# Altium PCB NBP11 Xilinx Spartan-III BGA456 Rev1.01.PcbDoc (part 3 of 3)
Units mm, origin at the board's own origin, x right, y up, seen from the top; angles counter-clockwise.
Board outline 69 x 80.99 mm, 6 copper layers (Top Layer, MidLayer1, InternalPlane1, InternalPlane2, MidLayer2, Bottom Layer); 105 components, 277 nets, 967 pads, 559 vias.
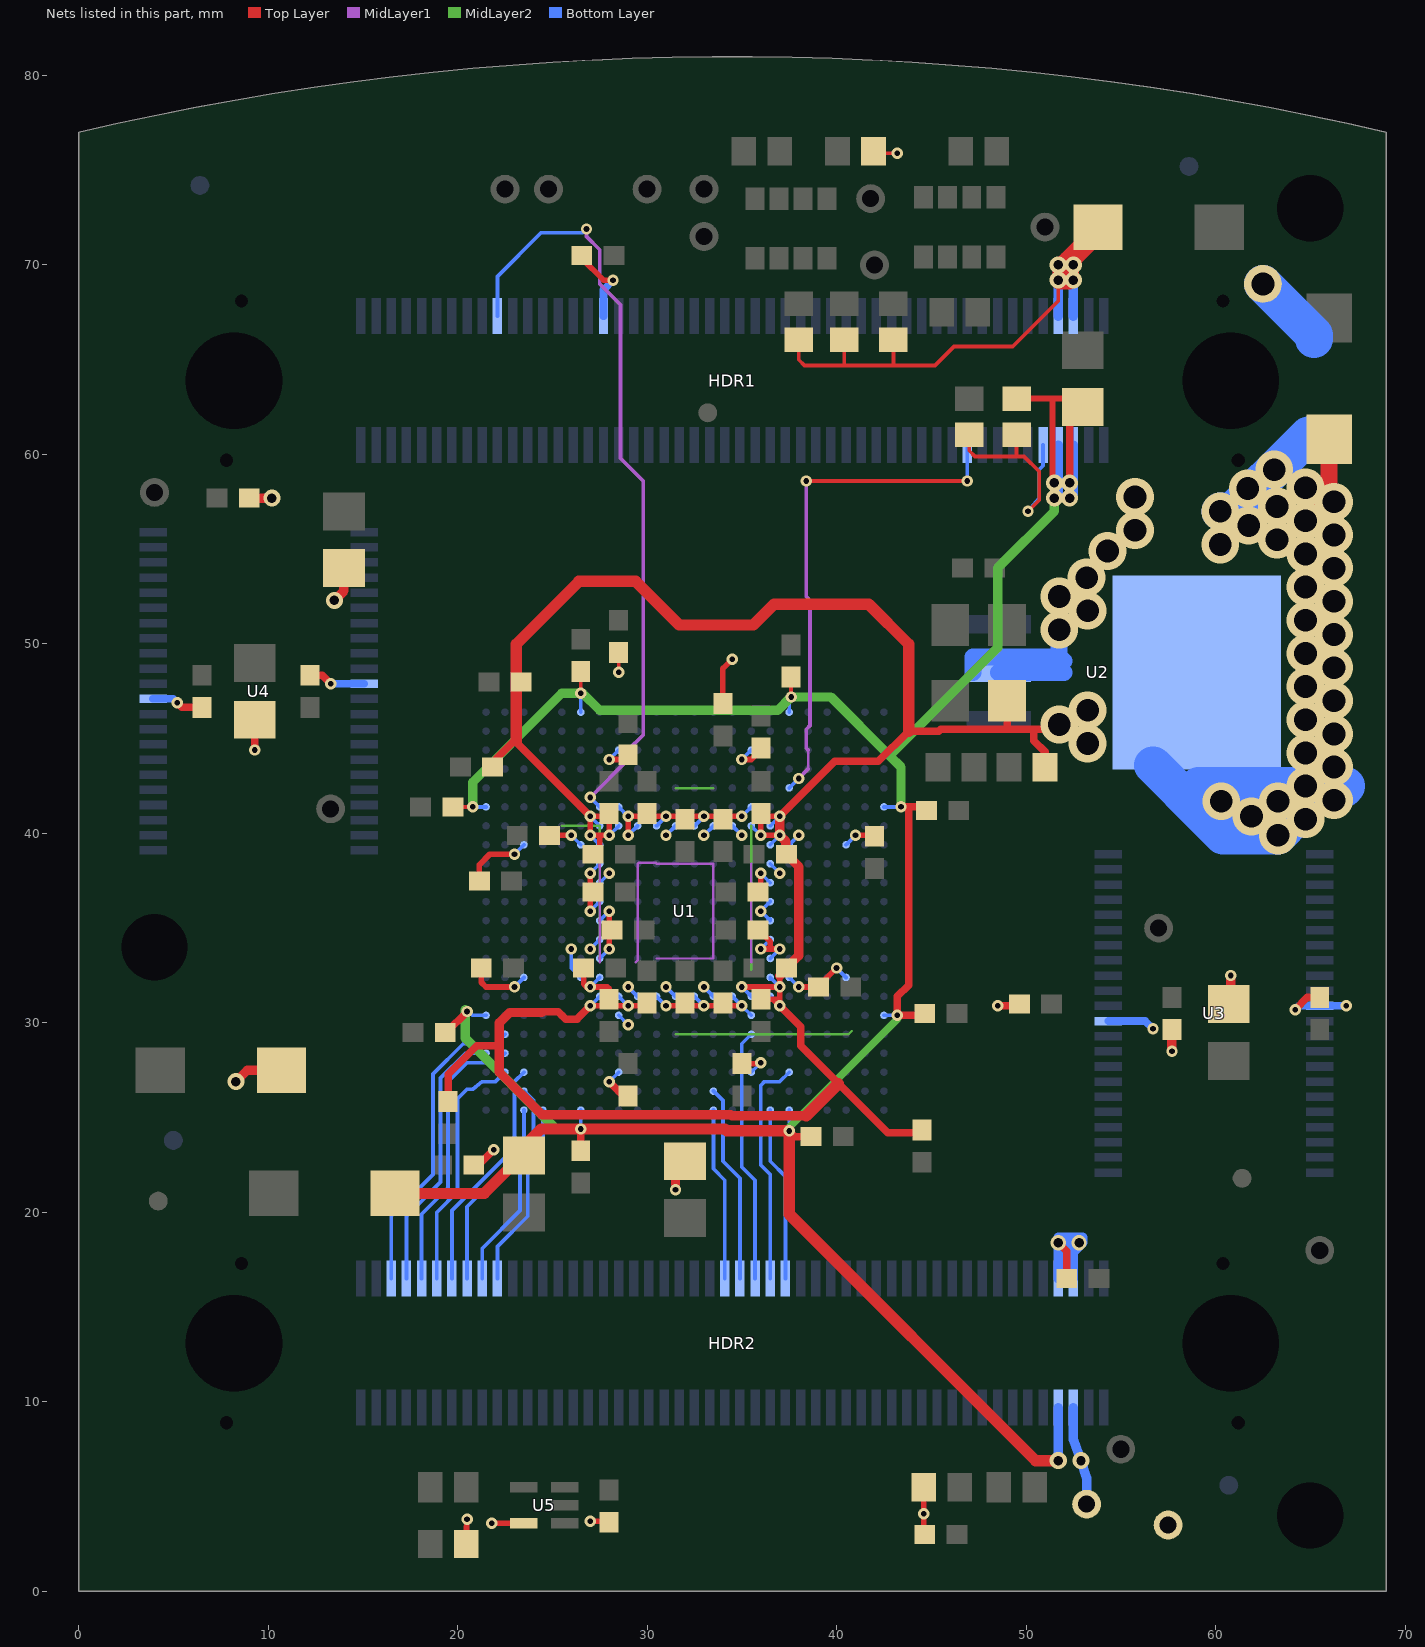
[diagram p7: the nets of this part, all layers, seen from the top]

## Via types
v1: diameter 0.6, hole 0.3, Top Layer to Bottom Layer, tented both sides, 480 vias
v2: diameter 2, hole 1.2, Top Layer to Bottom Layer, tented both sides, 42 vias
v3: diameter 0.9, hole 0.5, Top Layer to Bottom Layer, tented both sides, 33 vias
v4: diameter 0.8, hole 0.5, Top Layer to Bottom Layer, tented both sides, 2 vias
v5: diameter 1.3, hole 0.9, Top Layer to Bottom Layer, tented both sides, 1 vias
v6: diameter 1.8, hole 0.9, Top Layer to Bottom Layer, tented both sides, 1 vias

## Nets (pads, with @x,y where several pads share a name; then routed paths per layer and width w, separated by ;. In a path a pad name is that pad's centre, name@x,y a point inside that pad or via, vN(x,y) a via of type N, cw(c..) or ccw(c..) an arc to the next point about the centre after c; other vN are vias at no path point) (continued)
SW3: HDR2.50 U1.N22 | length 9.1
  Bottom Layer w0.2: U1.N22@33.5,25.4 33.5,22.3 34.1,21.7 HDR2.50@34.1,16.5
SW4: HDR2.52 U1.N21 | length 10.5
  Bottom Layer w0.2: U1.N21@33.5,26.4 34,25.9 34,22.7 34.9,21.8 HDR2.52@34.9,16.5
SW5: HDR2.54 U1.R18 | length 13.4
  Bottom Layer w0.2: U1.R18@35.5,29.4 35,28.9 35,22.4 35.7,21.7 HDR2.54@35.7,16.5
SW6: HDR2.56 U1.U20 | length 12.2
  Bottom Layer w0.2: HDR2.56@36.5,16.5 36.5,22 36,22.5 36,26.7 36.2,26.9 37,26.9 U1.U20@37.5,27.4
SW7: HDR2.58 U1.T22 | length 9.2
  Bottom Layer w0.2: U1.T22@36.5,25.4 36.5,22.7 37.3,21.9 HDR2.58@37.3,16.5
SWC0: HDR2.18 U1.C21 | length 11.2
  Bottom Layer w0.2: HDR2.18@21.3,16.5 21.3,18.1 23.3,20.1 23.3,22.5 24,23.2 24,25.9 U1.C21@23.5,26.4
SWC1: HDR2.16 U1.C22 | length 10.1
  Bottom Layer w0.2: HDR2.16@20.5,16.5 20.5,20.3 23.5,23.3 U1.C22@23.5,25.4
SWC2: HDR2.14 U1.C20 | length 12.5
  Bottom Layer w0.2: HDR2.14@19.7,16.5 19.7,18.1 19.7,20.1 23,23.4 23,26.9 U1.C20@23.5,27.4
SWC3: HDR2.6 U1.B18 | length 16.4
  Bottom Layer w0.2: HDR2.6@16.5,16.5 16.5,19.8 18.7,22 18.7,27.3 20.3,28.9 22,28.9 U1.B18@22.5,29.4
SWR0: HDR2.20 U1.D22 | length 9.9
  Bottom Layer w0.2: HDR2.20@22.1,16.5 22.1,18.2 23.7,19.8 23.7,22.3 24.5,23.1 U1.D22@24.5,25.4
SWR1: HDR2.12 U1.B20 | length 13
  Bottom Layer w0.2: HDR2.12@18.9,16.5 18.9,20 20,21.1 20,26 20.5,26.5 20.8,26.5 21.3,26.9 22,26.9 U1.B20@22.5,27.4
SWR2: HDR2.10 U1.B19 | length 14.6
  Bottom Layer w0.2: HDR2.10@18.1,16.5 18.1,19.9 19.5,21.3 19.5,26.9 20.5,27.9 22,27.9 U1.B19@22.5,28.4
SWR3: HDR2.8 U1.A19 | length 14.3
  Bottom Layer w0.2: HDR2.8@17.3,16.5 17.3,19.8 19.1,21.6 19.1,27.1 20.4,28.4 U1.A19@21.5,28.4
TEST: HDR1.81 U1.U5 | length 27.2
  Top Layer w0.2: v1(38.4,58.6) v1(46.9,58.6)
  MidLayer1 w0.127: 38.5,43.4 38.5,44.4
  MidLayer1 w0.2: v1(38,42.9) 38.5,43.4 ; v1(38.4,58.6) 38.4,52.5 38.6,52.3 38.6,45.7 38.4,45.5 38.4,44.5 38.5,44.4
  Bottom Layer w0.2: U1.U5@37.5,42.4 v1(38,42.9) ; v1(46.9,58.6) HDR1.81@46.9,60.5
VCC: C2.1 C3.1 C9.1 C10.1 C11.1 C12.1 C13.1 C14.1 C15.1 C16.1 C18.2 C35.1 C36.1 C37.1 C38.1 C39.1 C40.1 C41.1 C42.1 C43.1 C44.1 C45.1 C46.1 C47.1 C48.1 C49.1 C50.1 C51.1 C52.1 C53.1 C54.1 C55.1 C56.1 C61.1 C62.1 C63.1 C64.1 HDR1.34 HDR1.94 HDR1.96 HDR2.94 HDR2.96 R1.2 R2.2 R3.2 R4.1 R12.1 R13.2 TP3.1 U1.C8 U1.C15 U1.F8 U1.F15 U1.G9 U1.G10 U1.G11 U1.G12 U1.G13 U1.G14 U1.H3 U1.H6 U1.H17 U1.H20 U1.J7 U1.J16 U1.K7 U1.K16 U1.L7 U1.L16 U1.M7 U1.M16 U1.N7 U1.N16 U1.P7 U1.P16 U1.R3 U1.R6 U1.R17 U1.R20 U1.T9 U1.T10 U1.T11 U1.T12 U1.T13 U1.T14 U1.U8 U1.U15 U1.Y8 U1.Y15 U3.11 U3.33 U4.11 U4.33 U5.5 | length 151.2
  Top Layer w0.2: v1(28.5,48.5) C50.1@28.5,49.55 ; R2.2@38,66.05 38,65 38.3,64.7 40.4,64.7 ; R3.2@40.4,66.05 40.4,64.7 ; R1.2@41.95,76 42.3,75.9 v1(43.2,75.9) ; R4.1@43,66.05 43,64.7 ; v3(51.7,70) v3(51.7,69.2) 51.7,69 51.7,68.1 49.3,65.7 46.2,65.7 45.2,64.7 43,64.7 ; 40.4,64.7 43,64.7
  Top Layer w0.3: R13.2@20.425,2.501 v1(20.5,3.8) ; R13.2@20.45,2.5 R13.2@20.7,2.5 ; C54.1@21.15,37.5 21.15,38.35 21.7,38.9 v1(23,38.9) ; C10.1@21.25,32.9 21.25,32.15 21.5,31.9 v1(23,31.9) ; v1(21.8,3.6) U5.5@23.5,3.6 ; C51.1@24.85,39.9 v1(26,39.9) ; C38.1@26.55,70.498 26.55,70.35 27.7,69.2 v1(28.2,69.2) ; v1(27,3.7) C48.1@28,3.7 ; v1(27,35.9) 27,36.9 v1(27,37.9) ; v1(28,33.9) 28,34.9 v1(28,35.9) ; v1(28,43.9) C15.1@28.9,43.9 ; v1(29,39.9) v1(29,40.9) 30,40.9 v1(31,40.9) 32,40.9 v1(33,40.9) 34,40.9 v1(35,40.9) ; v1(31,30.9) 32,30.9 v1(33,30.9) 34,30.9 v1(35,30.9) ; C9.1@34,46.85 34,48.7 v1(34.5,49.2) ; C49.1@35,27.85 35.95,27.85 v1(36,27.9) ; v1(35,43.9) 35.5,43.9 36,44.4 C11.1@36,44.5 ; C44.1@35.85,34.9 35.9,34.9 36.5,34.3 36.5,33.9 ; C45.1@35.85,36.9 36,37.05 v1(36,37.9) ; v1(36,33.9) 36.5,33.9 ; v1(37,33.9) 36.5,33.9 ; v1(38,31.9) C53.1@39.05,31.9 39.05,31.95 v1(40,32.9) ; v1(41,39.9) C52.1@41.95,39.9 ; C36.1@44.6,3.05 v1(44.6,4.1) R12.1@44.6,5.5
  Top Layer w0.4: v1(5.2,46.9) 5.45,46.65 C35.1@6.5,46.65 ; v1(9.3,44.4) C64.1@9.3,46 ; C12.1@12.2,48.35 12.85,48.35 v1(13.3,47.9) ; C55.1@20.85,22.5 21.1,22.5 v1(21.9,23.3) ; v1(28,26.9) 28.8,26.1 C18.2@29,26.1 ; v1(48.5,30.9) C13.1@49.6,30.9 ; v4(51.7,18.4) 52.15,17.95 C37.1@52.15,16.5 ; v1(64.2,30.7) 64.85,31.35 C47.1@65.5,31.35
  Top Layer w0.5: v3(8.3,26.9) 8.9,27.5 C3.1@10.7,27.5 10.7,27 C3.1@10.8,27 ; C39.1@9.1,57.7 v3(10.2,57.7) ; v3(13.5,52.3) 14,52.8 C61.1@14,54 ; 31.5,21.5 31.5,22.7 C62.1@31.5,22.9 ; v1(57.7,28.5) C46.1@57.7,29.65 ; C63.1@60.8,31 v1(60.8,32.5)
  Top Layer w0.6: v3@52.2,70.1 52.1,70 52.1,69.2 v3@52.1,69 ; C2.1@53.8,71.4 52.5,70.1 v3(52.5,70) v3(52.5,69.2) 52.3,69 v3@52.1,69 ; C2.1@53.8,72 53.7,72 52.1,70.4 v3(51.7,70) v3(51.7,69.2) 51.7,69 v3@52.1,69
  Bottom Layer w0.2: v1(23,31.9) U1.C15@23.5,32.4 ; v1(23,38.9) U1.C8@23.5,39.4 ; v1(26,33.9) 26,32.9 U1.F15@26.5,32.4 ; v1(26,39.9) U1.F8@26.5,39.4 ; v1(27,33.9) U1.G13@27.5,34.4 ; v1(27,35.9) U1.G11@27.5,36.4 ; v1(27,37.9) U1.G9@27.5,38.4 ; U1.G14@27.5,33.4 27.55,33.45 v1(28,33.9) ; U1.G12@27.5,35.4 v1(28,35.9) ; U1.G10@27.5,37.4 v1(28,37.9) ; v1(28,26.9) U1.H20@28.5,27.4 ; v1(28,43.9) U1.H3@28.5,44.4 ; U1.H17@28.5,30.4 v1(29,29.9) ; U1.H6@28.5,41.4 v1(29,40.9) ; v1(29,31.9) U1.J16@29.5,31.4 ; v1(29,39.9) U1.J7@29.5,40.4 ; U1.K16@30.5,31.4 v1(31,30.9) ; U1.K7@30.5,40.4 30.55,40.45 v1(31,40.9) ; v1(31,31.9) U1.L16@31.5,31.4 ; v1(31,39.9) U1.L7@31.5,40.4 ; U1.M16@32.5,31.4 v1(33,30.9) ; U1.M7@32.5,40.4 v1(33,40.9) ; v1(33,31.9) 33.45,31.45 U1.N16@33.5,31.4 ; v1(33,39.9) U1.N7@33.5,40.4 ; U1.P16@34.5,31.4 v1(35,30.9) U1.R17@35.5,30.4 ; U1.P7@34.5,40.4 v1(35,39.9) ; v1(35,40.9) U1.R6@35.5,41.4 ; v1(35,43.9) U1.R3@35.5,44.4 ; U1.R20@35.5,27.4 35.55,27.45 v1(36,27.9) ; v1(36,33.9) U1.T13@36.5,34.4 ; v1(36,37.9) U1.T10@36.5,37.4 ; U1.T14@36.5,33.4 v1(37,33.9) ; U1.T12@36.5,35.5 U1.T12@36.5,35.4 v1(36,35.9) U1.T11@36.5,36.4 ; U1.T9@36.5,38.4 v1(37,37.9) ; U1.U15@37.5,32.4 v1(38,31.9) ; U1.U8@37.5,39.4 37.55,39.45 v1(38,39.9) ; v1(40,32.9) 40.45,32.45 U1.Y15@40.5,32.4 ; U1.Y8@40.5,39.4 40.55,39.45 v1(41,39.9)
  Bottom Layer w0.4: U4.11@3.925,47.1 5,47.1 v1(5.2,46.9) ; v1(13.3,47.9) U4.33@15.075,47.9 ; HDR1.34@27.7,67.3 27.7,68.7 v1(28.2,69.2) ; U3.11@54.35,30.1 56.3,30.1 v1(56.7,29.7) ; v1(64.2,30.7) 64.4,30.9 U3.33@65.5,30.9 ; U3.33@65.3,30.9 U3.33@65.5,30.9 ; 66.375,30.9 v1(66.9,30.9) ; 66.4,30.9 U3.33@65.5,30.9
  Bottom Layer w0.5: HDR2.94@51.7,16.5 51.7,17.9 ; HDR1.94@51.7,67.3 v3(51.7,69.2) v3(51.7,70) ; HDR2.96@52.5,16.5 52.5,17.9 ; HDR1.96@52.5,67.3 v3(52.5,69.2) v3(52.5,70) ; 51.7,17.9 52.3,17.9 52.5,18.1 ; 51.7,17.9 v4(51.7,18.4) ; v4(51.7,18.4) v4(52.8,18.4) 52.5,18.1 ; v4(51.7,18.4) 51.7,18.7 52.8,18.7 53,18.7 53,18.4 52.9,18.3 52.5,17.9 ; 52.5,17.9 52.5,18.1
  other v1: 31.5,21.2
VCCAUX: C1.1 C5.1 C6.1 C19.1 C20.1 C21.1 C22.1 C23.1 C24.1 C58.1 C59.1 HDR1.93 HDR1.95 HDR2.93 HDR2.95 R10.1 TP8.1 U1.A6 U1.A17 U1.AB6 U1.AB17 U1.F1 U1.F22 U1.U1 U1.U22 | length 195
  Top Layer w0.2: C23.1@19.85,41.4 v1(20.8,41.4) ; v1(26.5,47.4) C20.1@26.5,48.55 ; v1(37.6,47.2) C21.1@37.6,48.25 C21.1@37.6,48.3 ; v1(43.4,41.4) 43.8,41.4 C24.1@44.25,41.4
  Top Layer w0.3: R10.1@49.5,62.95 51.4,62.95 ; v3(51.5,58.5) 51.4,58.6 51.4,62.95 ; C59.1@53,63 52.95,62.95 51.4,62.95
  Top Layer w0.4: C22.1@19.395,29.502 19.4,29.4 19.408,29.495 v1(20.5,30.6) ; C19.1@26.5,23.25 v1(26.5,24.4) ; v1(37.5,24.3) 37.8,24 C6.1@38.65,24 ; C5.1@44.55,30.4 v1(43.2,30.4) 43.2,31.4 43.8,32 43.8,41.4 ; C24.1@44.7,41.4 43.8,41.4 ; v3(52.3,58.5) C59.1@52.3,62.1 ; 43.8,41.4 v1(43.4,41.4) 43.8,41.4
  Top Layer w0.6: C1.1@16.7,21 21.4,21 23.4,23 C58.1@23.5,23 23.5,23.5 24.4,24.4 v1(26.5,24.4) 34.1,24.4 34.2,24.3 v1(37.5,24.3) 37.5,19.9 50.5,6.9 v3(51.7,6.9)
  MidLayer2 w0.127: 25.5,40.408 27.484,40.408 ; 27.5,33.408 27.5,40.392 ; 31.5,42.392 33.484,42.392 ; 31.508,29.4 40.627,29.4 40.8,29.572 ; 35.492,40.4 35.492,38.4 35.5,38.392 35.5,32.8
  MidLayer2 w0.4: v1(37.5,24.3) 37.5,24.5 43.2,30.2 v1(43.2,30.4)
  MidLayer2 w0.5: v1@20.4,30.7 20.4,30.6 20.4,29.2 25.2,24.4 v1(26.5,24.4) ; v1(20.8,41.4) 20.8,42.7 25.5,47.4 v1(26.5,47.4) 26.6,47.4 27.5,46.5 36.9,46.5 v1(37.6,47.2) 39.7,47.2 42.8,44.1 ; v1(43.4,41.4) 43.4,43.5 42.8,44.1 ; v3(51.5,57.7) 51.5,57 48.5,54 48.5,49.8 42.8,44.1
  Bottom Layer w0.2: v1(20.5,30.6) 20.8,30.4 U1.A17@21.5,30.4 ; v1(20.8,41.4) U1.A6@21.5,41.4 ; v1(26.5,24.4) U1.F22@26.5,25.4 ; U1.F1@26.5,46.4 v1(26.5,47.4) ; v1@37.5,24.5 U1.U22@37.5,25.4 ; U1.U1@37.5,46.4 37.5,47.1 v1(37.6,47.2) ; U1.AB17@42.5,30.4 v1(43.2,30.4) ; U1.AB6@42.5,41.4 v1(43.4,41.4)
  Bottom Layer w0.5: v3(51.5,57.7) 51.7,57.9 51.7,58.5 HDR1.93@51.7,60.5 ; v3(51.7,6.9) HDR2.93@51.7,9.7 ; v3(52.3,57.7) 52.5,57.9 52.5,58.5 HDR1.95@52.5,60.5 ; HDR2.95@52.5,9.7 52.5,8 v3(52.9,6.9) ; v3@52.734,6.866 v3(52.9,6.9) ; TP8.1@53.2,4.6 53.2,6 v3(52.9,6.9)
VCCINT: C4.1 C7.1 C8.1 C25.1 C26.1 C27.1 C28.1 C29.1 C30.1 C31.1 C32.1 C33.1 C34.1 C57.1 C60.1 R14.1 TP16.1 U1.G7 U1.G8 U1.G15 U1.G16 U1.H7 U1.H16 U1.R7 U1.R16 U1.T7 U1.T8 U1.T15 U1.T16 U2.2 U2.4 | length 222.7
  Top Layer w0.3: C29.1@26.65,32.9 26.65,32.05 26.8,31.9 v1(27,31.9) 27.9,31.9 28,31.8 C57.1@28,31.25 ; v1(27,30.9) 28,30.9 v1(29,30.9) 30,30.9 C34.1@30.1,30.9 ; C33.1@27.5,38.8 27.5,38.9 27.5,39.9 ; v1(35,31.9) 36,31.9 v1(37,31.9) ; C25.1@36,31.25 36.65,31.25 ; C31.1@37,32.5 v1(37,31.9) ; v1(37,39.9) v1(36,39.9) 36,40.75 36.15,40.9 v1(37,40.9) ; 27.5,39.9 v1(28,39.9) C28.1@28,41.05 27.85,40.9 v1(27,40.9) v1(27,39.9) 27.5,39.9 ; 36.65,31.25 36.95,31.25 37,31.3 ; 36.65,31.25 v1(37,30.9) 37,31.3 ; 37,31.3 v1(37,31.9)
  Top Layer w0.4: C27.1@19.5,25.85 19.5,27.3 21,28.8 22.2,28.8 22.2,30 ; C8.1@21.8,43.7 23,44.9 23.1,44.9 23.1,44.8 v1(27,40.9) ; 24.449,30.6 25.3,30.6 25.7,30.2 26.3,30.2 v1(27,30.9) ; v1(37,30.9) 38.1,29.8 38.1,28.8 40.109,26.791 ; v1(37,40.9) 39.9,43.8 42.2,43.8 43.8,45.4 45.4,45.4 45.5,45.5 50.4,45.5 ; 40.091,26.791 40.109,26.791 ; C26.1@44.3,24.2 42.7,24.2 40.109,26.791 ; 49,45.5 C60.1@49,47 ; R14.1@51,43.5 51,44.3 50.4,44.9 50.4,45.5 ; v2(51.75,45.75) 51.5,45.5 50.4,45.5
  Top Layer w0.5: 24.449,30.549 22.749,30.549 22.2,30 22.2,28.8 22.2,27.4 24.45,25.15 34.411,25.15 34.461,25.1 38.4,25.1 ; C31.1@37,32.5 C31.1@37.35,32.9 38,33.55 38,38.25 C30.1@37.35,38.9 37.323,38.927 37.323,39.577 v1(37,39.9) v1(37,40.9)
  Top Layer w0.6: 23.1,44.9 23.1,48 23.1,50 26.4,53.3 29.4,53.3 31.7,51 35.6,51 36.7,52.1 41.7,52.1 43.8,50 43.8,45.4 ; 38.4,25.1 40.091,26.791
  Top Layer w0.9: v2(64.75,56.5) 65.625,57.375 66,57.75 66,58.25 C4.1@66,60.8
  MidLayer1 w0.127: 27.5,33.2 27.5,38.392 ; 29.4,33.2 29.5,33.3 29.5,38.392 ; 29.564,38.45 30.45,38.45 30.508,38.392 33.5,38.392 33.492,38.384 33.492,33.4 30.508,33.4 ; 35.5,33.2 35.5,38.392
  Bottom Layer w0.2: v1(27,30.9) U1.G16@27.5,31.4 ; v1(27,31.9) U1.G15@27.5,32.4 ; v1(27,39.9) 27.45,39.45 U1.G8@27.5,39.4 ; v1(27,40.9) U1.G7@27.5,40.4 ; v1(28,39.9) U1.H7@28.5,40.4 ; U1.H16@28.5,31.4 v1(29,30.9) ; v1(35,31.9) 35.45,31.45 U1.R16@35.5,31.4 ; U1.R7@35.5,40.4 v1(36,39.9) ; U1.T16@36.5,31.4 v1(37,30.9) ; U1.T15@36.5,32.3 U1.T15@36.5,32.4 v1(37,31.9) ; U1.T8@36.5,39.4 v1(37,39.9) ; U1.T7@36.5,40.4 36.55,40.45 v1(37,40.9)
  Bottom Layer w0.9: U2.2@47.2,48.5 47.2,49.3 ; 47.4,49.1 47.2,49.3 ; U2.2@48.55,48.5 52,48.5 ; 51.75,49.1 52,49.1 51.75,49.35 ; v2(51.75,50.75) 51.75,49.35 ; v2@62.972,58.183 63,58 v2@63,57.8 ; 47.2,49.3 48.55,49.3 51.7,49.3 51.75,49.35
  Bottom Layer w2: U2.4@56.7,43.6 59.45,40.85 60.4,39.9 61.9,39.9 v2(63.3,39.9) 64.2,40.8 64.45,41.05 65.325,41.925 65.7,42.3 65.8,42.4 66.25,42.4 66.8,42.4 66.9,42.5 66.25,42.5 v2(64.75,42.5) 63.3,42.5 61.9,42.5 60.3,42.5 59.1,42.5 59.9,41.7 v2(60.3,41.7) 61.9,41.7 v2(63.3,41.7) ; v2(60.25,57) 60.9,57 60.95,57.05 61.9,58 62.2,58.3 v2(63.1,59.2) 63.45,59.55 64.9,61 ; TP16.1@62.5,69 65.2,66.3 65.2,66.1
  other v2: 64.75,40.75 61.9,40.9 66.25,41.75 66.25,43.5 64.75,44.25 53.25,44.75 66.25,45.25 64.75,46 53.25,46.5 66.25,47 64.75,47.75 66.25,48.75 64.75,49.5 66.25,50.5 64.75,51.25 53.25,51.75 66.25,52.25 51.75,52.5 64.75,53 53.2,53.5 66.25,54 64.75,54.75 54.3,54.9 60.25,55.25 63.25,55.5 66.25,55.75 55.75,56 61.75,56.25 63.25,57.25 66.25,57.5 55.75,57.75 61.7,58.2 64.75,58.25
VDRIVE: HDR1.20 U1.G6 | length 40.9
  MidLayer1 w0.2: v1(26.8,71.9) 26.8,71.5 27.5,70.8 27.5,69 28.6,67.9 28.6,59.8 29.8,58.6 29.8,45.2 29,44.4 29,43.9 v1(27,41.9)
  Bottom Layer w0.2: HDR1.20@22.1,67.3 22.1,69.4 24.4,71.7 26.6,71.7 v1(26.8,71.9) ; v1(27,41.9) U1.G6@27.5,41.4
VREF: HDR1.91 R10.2 R11.1 | length 12.3
  Top Layer w0.2: R11.1@47,61.05 47,60.2 47.3,59.9 49.5,59.9 ; R10.2@49.5,61.05 49.5,59.9 ; v1(50.1,57) 50.7,57.6 50.7,59.1 49.9,59.9 49.5,59.9
  Bottom Layer w0.2: v1(50.1,57) 50.7,57.7 50.7,59.2 50.9,59.4 HDR1.91@50.9,60.5
pads on no net: HDR1.MH1 HDR1.MH2 HDR1.MH3 HDR1.MH4 HDR1.MH5 HDR1.MH6 HDR2.MH1 HDR2.MH2 HDR2.MH3 HDR2.MH4 HDR2.MH5 HDR2.MH6 U1.A7 U1.A16 U1.AA3 U1.AA7 U1.AA9 U1.AA11 U1.AA12 U1.AA16 U1.AA19 U1.AB7 U1.AB9 U1.AB14 U1.AB16 U1.AB19 U1.B7 U1.B11 U1.B16 U1.C16 U1.D8 U1.D16 U1.E5 U1.E8 U1.F6 U1.F14 U1.G3 U1.G4 U1.G5 U1.G20 U1.H1 U1.H2 U1.H4 U1.H18 U1.H19 U1.H21 U1.H22 U1.J1 U1.J2 U1.J4 U1.J5 U1.J6 U1.J17 U1.J18 U1.J19 U1.J21 U1.J22 U1.K5 U1.K6 U1.K17 U1.K18 U1.N5 U1.N6 U1.N17 U1.N18 U1.P1 U1.P2 U1.P4 U1.P5 U1.P6 U1.P17 U1.P18 U1.P19 U1.P21 U1.P22 U1.R1 U1.R2 U1.R4 U1.R5 U1.R19 U1.R21 U1.R22 U1.T3 U1.T17 U1.T19 U1.T20 U1.U9 U1.U12 U1.U14 U1.V11 U1.V12 U1.V15 U1.W3 U1.W7 U1.W11 U1.W15 U1.Y4 U1.Y7 U1.Y11 U1.Y12 U5.1

## Polygon pours and split planes (outlines as drawn)
VCCAUX on Top Layer "Top Layer-VCCAUX" (solid, remove dead copper, pour order 1001): 72.278,82.178 72.31,82.1 72.31,-2.3 72.278,-2.378 72.2,-2.41 -2.7,-2.41 -2.778,-2.378 -2.81,-2.3 -2.81,81.899 -3.909,81.99 -3.943,82.008 -3.978,82.022 -3.98,82.027 -3.984,82.029 -3.995,82.065 -4.01,82.1 -4.008,82.104 -4.01,82.109 -3.992,82.143 -3.978,82.178 -3.973,82.18 -3.971,82.184 -3.935,82.195 -3.9,82.21 72.2,82.21
VCCINT on Top Layer "Top Layer-VCCINT" (solid, remove dead copper, pour order 1000): 43.7,81.51 43.701,81.51 70.2,81.31 74.4,81.31 74.478,81.278 74.51,81.2 74.51,-4.1 74.478,-4.178 74.4,-4.21 52.4,-4.21 52.322,-4.178 52.29,-4.1 52.29,11.754 39.654,24.39 17.2,24.39 17.122,24.422 12.822,28.722 12.79,28.8 12.79,34.3 12.822,34.378 15.79,37.346 15.79,45.3 15.822,45.378 17.422,46.978 24.422,53.978 24.5,54.01 43.054,54.01 44.822,55.778 44.9,55.81 53.154,55.81 53.99,56.646 53.99,70.954 43.622,81.322 43.622,81.323 43.606,81.361 43.59,81.4 43.59,81.401 43.606,81.439 43.622,81.478 43.623,81.478 43.661,81.494 43.7,81.51
GND on MidLayer1 "MidLayer1-GND" (solid, remove dead copper, pour order 1004): 72.478,83.678 72.51,83.6 72.51,-3 72.478,-3.078 72.4,-3.11 -4.6,-3.11 -4.639,-3.094 -4.678,-3.078 -4.694,-3.039 -4.71,-3 -4.91,83.6 -4.894,83.639 -4.878,83.678 -4.839,83.694 -4.8,83.71 72.4,83.71
VCCINT on MidLayer1 "MidLayer1-VCCINT 1" (solid, remove dead copper, pour order 1003): 45.478,48.678 45.51,48.6 45.51,22.6 45.478,22.522 45.4,22.49 18.6,22.49 18.522,22.522 18.49,22.6 18.49,48.6 18.522,48.678 18.6,48.71 45.4,48.71
VCCINT on MidLayer1 "MidLayer1-VCCINT" (solid, remove dead copper, pour order 1002): 43.401,84.41 72.601,84.11 72.639,84.094 72.678,84.078 72.678,84.077 72.679,84.077 72.694,84.038 72.71,84 72.71,33.5 72.678,33.422 72.6,33.39 43.4,33.39 43.322,33.422 43.29,33.5 43.29,84.3 43.29,84.301 43.306,84.339 43.322,84.378 43.323,84.378 43.323,84.379 43.362,84.394 43.4,84.41
VCCAUX on MidLayer2 "MidLayer2-VCCAUX" (solid, remove dead copper, pour order 1006): -7.4,84.61 -7.399,84.61 60.001,84.21 60.039,84.194 60.078,84.178 60.078,84.177 60.094,84.139 60.11,84.1 60.11,-10.9 60.078,-10.978 60,-11.01 -7.4,-11.01 -7.478,-10.978 -7.51,-10.9 -7.51,84.5 -7.51,84.501 -7.494,84.539 -7.478,84.578 -7.477,84.578 -7.439,84.594 -7.4,84.61
VCCINT on MidLayer2 "MidLayer2-VCCINT" (solid, remove dead copper, pour order 1005): 72.436,84.795 72.474,84.782 72.475,84.779 72.478,84.778 72.493,84.741 72.51,84.706 72.509,84.703 72.51,84.7 72.51,-4.1 72.478,-4.178 72.4,-4.21 57.3,-4.21 57.222,-4.178 57.19,-4.1 57.19,25.454 47.622,35.022 47.59,35.1 47.59,44.7 47.622,44.778 50.09,47.246 50.09,53.1 50.122,53.178 53.79,56.846 53.79,59.89 42.8,59.89 42.722,59.922 42.69,60 42.69,83.2 42.705,83.236 42.718,83.274 42.721,83.275 42.722,83.278 42.759,83.293 42.794,83.31 72.394,84.81 72.397,84.809 72.4,84.81
+5 on Bottom Layer "Bottom Layer-+5" (solid, remove dead copper, pour order 1009): 56.478,62.778 56.51,62.7 56.51,49 56.478,48.922 56.4,48.89 43,48.89 42.922,48.922 42.89,49 42.89,62.7 42.922,62.778 43,62.81 56.4,62.81
GND on Bottom Layer "Bottom Layer-GND" (solid, remove dead copper, pour order 1008): 43.578,83.878 43.61,83.8 43.61,47.8 43.578,47.722 43.5,47.69 19.71,47.69 19.71,23.31 43.19,23.31 43.19,44.6 43.204,44.633 43.213,44.667 43.219,44.671 43.222,44.678 43.255,44.691 43.286,44.709 43.293,44.707 43.3,44.71 43.333,44.696 43.367,44.687 43.371,44.681 43.378,44.678 43.391,44.645 43.409,44.614 43.566,43.379 69.8,43.379 69.878,43.346 69.91,43.269 69.91,-3.5 69.878,-3.578 69.8,-3.61 -2.5,-3.61 -2.578,-3.578 -2.61,-3.5 -2.61,81.2 -2.578,81.278 0.022,83.878 0.1,83.91 43.5,83.91
VCCINT on Bottom Layer "Bottom Layer-VCCINT" (solid, remove dead copper, pour order 1007): 72.578,83.178 72.61,83.1 72.61,31 72.578,30.922 72.5,30.89 42.5,30.89 42.461,30.906 42.422,30.922 42.406,30.961 42.39,31 42.49,83.1 42.506,83.139 42.522,83.178 42.561,83.194 42.6,83.21 72.5,83.21
VCC on InternalPlane1 (split plane): 36.232,80.189 37.965,80.159 39.696,80.109 41.427,80.039 43.158,79.949 44.887,79.839 46.614,79.709 48.34,79.559 50.064,79.389 51.786,79.2 53.506,78.99 55.223,78.761 56.938,78.511 58.649,78.242 60.358,77.953 62.062,77.645 63.763,77.317 65.461,76.969 67.154,76.602 68.197,76.363 68.197,0.803 0.803,0.803 0.803,76.363 1.846,76.602 3.539,76.969 5.237,77.317 6.938,77.645 8.642,77.953 10.351,78.242 12.062,78.511 13.777,78.761 15.494,78.99 17.214,79.2 18.936,79.389 20.66,79.559 22.386,79.709 24.113,79.839 25.842,79.949 27.573,80.039 29.304,80.109 31.035,80.159 32.768,80.189 34.5,80.199
GND on InternalPlane2 (split plane): 36.232,80.189 37.965,80.159 39.696,80.109 41.427,80.039 43.158,79.949 44.887,79.839 46.614,79.709 48.34,79.559 50.064,79.389 51.786,79.2 53.506,78.99 55.223,78.761 56.938,78.511 58.649,78.242 60.358,77.953 62.062,77.645 63.763,77.317 65.461,76.969 67.154,76.602 68.197,76.363 68.197,0.803 0.803,0.803 0.803,76.363 1.846,76.602 3.539,76.969 5.237,77.317 6.938,77.645 8.642,77.953 10.351,78.242 12.062,78.511 13.777,78.761 15.494,78.99 17.214,79.2 18.936,79.389 20.66,79.559 22.386,79.709 24.113,79.839 25.842,79.949 27.573,80.039 29.304,80.109 31.035,80.159 32.768,80.189 34.5,80.199

## Keep-outs
Top Layer:
  circle w0.254: c61.4,21.8 r2.5
  circle w0.254: c33.2,62.2 r2.5
  circle w0.254: c4.2,20.6 r2.5
Bottom Layer:
  circle w0.254: c60.7,5.6 r2.5
  circle w0.254: c6.4,74.2 r2.5
  circle w0.254: c58.6,75.2 r2.5
  circle w0.254: c5,23.8 r2.5
Keep-Out Layer:
  the board outline again, w1.8

## Other copper
Top Layer:
  rectangle net VCCAUX: 51.4,57.4 52.6,62.95
Bottom Layer:
  rectangle net VCCINT: 63.9,57.3 67.9,68.3
  rectangle net VCCAUX: 51,57.2 52.8,59
  rectangle net VCCAUX: 51.5,57.3 52.7,59.5
  rectangle net GND: 53.3,68.6 55.1,70.5
  rectangle net VCC: 51.2,68.6 53,70.5
  rectangle net VCCINT: 55,42.5 67.9,58.5
  rectangle net VCCINT: 53.6,42.5 59.7,55.4
  rectangle net VCCINT: 51.3,42.5 61.5,53.3
  rectangle net VCCAUX: 51.5,6.5 52.7,8.6

## Silkscreen, mask and mechanical layers (free items; w line width, h text height)
Top Overlay:
  circle w0.127: c65,73 r2.5
  circle w0.127: c65,4 r2.5
  circle w0.127: c4,34 r2.5
  lines w0.08: 6,72.8 6.2,73 8.4,73 ; 8.4,58.45 8.6,58.8 11.2,58.8 ; 9.9,54.7 12.4,54.7 ; 17.1,35.3 19.7,35.3 20.2,35.8 22.4,35.8 23.4,35.4 27.2,35.4 27.4,35.2 ; 17.2,38.5 25,38.5 26.5,36.9 ; 17.5,25.8 18.6,25.8 ; 17.513,42.12 17.9,42.1 ; 17.72,75.22 21.6,74 ; 19.713,44.22 20.15,44.25 ; 20,29 22.4,29 ; 20.1,37.1 21,36.7 ; 20.7,39.3 22.6,39.2 ; 22.513,34.62 23.2,34.4 26.2,34.4 26.6,33.9 ; 23.6,51.6 25.5,51.6 25.8,50.6 ; 23.6,69.8 26.498,69.8 26.55,69.748 ; 23.82,75.22 24.2,74.6 ; 24.7,45.5 22.6,45.5 27.6,39.8 ; 25.2,30.4 27,30.3 ; 25.4,25.2 28,25.2 28.2,25.8 ; 27.3,21.3 27.5,19.9 ; 27.4,45.5 27.5,43.6 ; 28,75.1 29.2,74.4 ; 29.4,51.4 29.6,51.7 31.9,51.7 ; 29.75,45.85 29.9,46.4 ; 30,25.3 32.4,25.3 32.5,30.4 ; 30,30.5 30.2,30.1 ; 30.5,48 32.6,48 32.3,41.5 ; 30.6,43.5 30.7,45.3 ; 30.8,78.2 32.9,74.8 ; 30.9,24.1 33.3,24.1 33.6,30.3 ; 32.8,68.7 33,70.7 ; 33.2,47.2 33.4,47.6 ; 34.5,41.2 34.5,43.4 ; 36.6,34.5 38.1,34.5 ; 36.6,37.1 36.8,37.3 39.3,37.3 40,36.6 ; 36.7,50.3 36.72,51.92 ; 36.75,45.3 38.1,45.3 ; 37,29.6 40.52,29.32 ; 37,42.3 38.7,42.3 ; 37.15,77 37.62,77.22 ; 38,38.8 38.4,38.8 41,41.4 ; 38.1,33.3 39,33.3 40.1,34.6 ; 40.2,71.6 41.789,71.6 ; 40.2,77.5 40.6,77 ; 40.9,61.6 45.1,61.6 45.2,61.6 44.6,68.2 42.5,69.5 ; 41.2,32.6 41.72,33.02 ; 42,43 44.4,43 ; 42.2,50.5 44.2,50.5 45.1,49.6 ; 42.2,70.8 43.884,70.8 ; 42.4,77.4 45.1,77.4 42.6,74.2 ; 42.5,45.9 44.5,45.9 45.4,45.5 ; 42.75,38.3 45.2,38.3 ; 46.1,63.4 46.1,64 ; 48.3,67 48.4,66.9 49.9,66.9 ; 48.5,63.5 48.5,64 ; 50.4,74.4 50.9,72.9 ; 51.4,42.6 51.5,42.5 54.1,42.5 ; 54.5,30.1 56.85,30.1 56.95,30.2 ; 55.8,7.2 55.9,7.1 58.7,7.1 ; 55.8,74.4 55.82,75.12 ; 57.9,2.6 58.8,1.7 61.5,1.7 ; 57.9,35 61.2,35 ; 59.5,68.8 61.3,69 ; 65.5,32 65.5,32.3
  lines w0.127: 0,1.5 1.5,1.5 1.5,0 ; 0,22.3 1.5,22.3 1.5,23.4 0,23.4 ; 0.001,53.6 1.501,53.6 1.501,54.7 0.001,54.7 ; 0,75.5 1.5,75.5 1.5,77.3 ; 15.7,79.8 15.7,78.1 17,78.1 17,79.9 ; 49.7,80.2 49.7,78.7 51,78.7 51,80.1 ; 67.5,0 67.5,1.5 69,1.5 ; 67.5,77.3 67.5,75.5 69,75.5 ; 68.999,22.3 67.5,22.3 67.5,23.4 69,23.4 ; 69,53.6 67.501,53.6 67.501,54.7 69.001,54.7
  text "GND" at 6.2,73.3 h0.8
Bottom Overlay:
  drawing of 856 lines, arcs and shapes, not listed
  text "NBP11" at 54.5,76.5 h1.3
  text "REV 1.01" at 47.7,76.4 h1.3
  text "1" at 14.4,58.4 h1
  text "1" at 14.224,7.62 h1
PCB Boundary:
  the board outline again, w0.25
  text "PCB boundary coincides with centre-line of tracks and arc" at 0,-12 h0.75
Gerber ID:
  text ".Layer_Name" at 0,-6 h0.75
Printout ID:
  text ".Printout_Name" at 0,-10 h0.75
Design Information:
  drawing of 719 lines, arcs and shapes, not listed
  text "NBP11 REV 1.01" at 317.627,202.041 h1.27
  text "DESIGN INFORMATION" at 261.62,201.914 h1.52
  text "BOARD NAME:" at 299.212,201.914 h1.52
  text "BOARD TECHNOLOGY" at 261.62,199.374 h1.52
  text "BOARD SIZE (REFER ALSO PROFILING INFORMATION)" at 309.88,199.374 h1.27
  text "69.00mm" at 312.6,197.1 h1.52
  text "15.748" at 277.419,197.012 h1.52
  text "81.00mm" at 335.6,197 h1.52
  text "5.000" at 291.389,196.885 h1.52
  text "5" at 266.446,196.834 h1.52
  text "X" at 328.549,196.326 h1.78
  text "(MIN. TRACK/   PADS  /   CLEARANCE     IN 0.001'')" at 260.096,194.294 h1.27
  text "MINIMUM ANNULAR RING 0.05MM (0.002'') EXTERNAL PER IPC-2221 CLASS 3 LEVEL C AND IS THE" at 261.62,191.754 h1.27
  text "MANUFACTURING REGISTRATION ALLOWANCE" at 261.62,189.468 h1.27
  text "LAND SIZE CALCULATION MINIMUM - NOMINAL HOLE SIZE + 0.508MM (0.020'')" at 261.62,186.674 h1.27
  text "AS INSTRUCTED" at 347.65,182.28 h1.52
  text "X" at 299.263,182.153 h1.52
  text "CIRCUIT TYPE:" at 261.62,182.102 h1.52
  text "SS" at 284.48,182.102 h1.27
  text "DS" at 302.26,182.102 h1.27
  text "X" at 316.865,182.102 h1.52
  text "PTH" at 320.04,182.102 h1.27
  text "ML" at 330.962,182.102 h1.27
  text "X" at 334.772,182.102 h1.52
  text "No. OFF" at 337.82,182.102 h1.27
  text "FINGER CONNECTOR DIM PER:" at 261.62,179.054 h1.52
  text "AS SHOWN" at 337.82,179.054 h1.27
  text "No. OFF TOTAL" at 278.384,176.26 h1.52
  text "ONE SIDE" at 320.04,176.26 h1.27
  text "BOTH SIDES" at 337.82,176.006 h1.27
  text "VIAS:" at 261.62,173.339 h1.52
  text "NONE" at 273.05,173.339 h1.14
  text "X" at 281.432,173.339 h1.52
  text "FEED THRU'" at 284.48,173.339 h1.14
  text "X" at 299.212,173.339 h1.52
  text "TENTED" at 302.26,173.339 h1.14
  text "BURIED LAYER SEQUENCE" at 320.04,173.339 h1.14
  text "UNIQUE DRILL" at 284.48,170.291 h1.14
  text "2 SIZE" at 302.26,170.291 h1.14
  text "BLIND LAYER SEQUENCE" at 320.04,170.291 h1.14
  text "Layer Stack Manager (Protel)" at 297.053,168.005 h1.27
  text "X" at 334.772,168.005 h1.52
  text "AS SHOWN" at 337.82,168.005 h1.27
  text "LAYER CONSTRUCTION PER:" at 261.62,167.878 h1.52
  text "Protel" at 342.646,165.338 h1.27
  text "(PFW)" at 352.933,165.211 h1.27
  text "ARTWORK:" at 261.62,165.084 h1.52
  text "MANUAL" at 284.48,165.084 h1.27
  text "DIGITISED" at 302.26,165.084 h1.27
  text "X" at 316.992,165.084 h1.52
  text "CAD" at 320.04,165.084 h1.27
  text "TYPE" at 330.962,165.084 h1.27
  text "ARTWORK/PATTERN MASTER LIST" at 261.62,160.385 h1.52
  text "DESCRIPTION" at 262.89,157.972 h1.27
  text "DRAWING No./CAD FILE REF." at 281.559,157.972 h1.27
  text "LAYER NAME" at 322.834,157.972 h1.27
  text "GERBER FILE REF" at 343.586,157.896 h1.27
  text "PCB FILE" at 261.366,155.432 h1.27
  text "SpartanIIIBGA456" at 281.737,155.356 h1.27
  text "PcbDoc" at 312.979,155.356 h1.02
  text "Top Paste Mask" at 321.158,152.892 h1.02
  text "GTP" at 363.779,152.816 h1.27
  text "GERBER FILE" at 261.366,152.765 h1.27
  text "GTO" at 363.728,150.327 h1.27
  text "Top Overlay" at 321.158,150.301 h1.02
  text "GERBER FILE" at 261.366,150.225 h1.27
  text "Top Solder Mask" at 321.158,147.863 h1.02
  text "GTS" at 363.779,147.736 h1.27
  text "GERBER FILE" at 261.366,147.685 h1.27
  text "TOP LAYER" at 321.158,145.272 h1.02
  text "GTL" at 363.779,145.196 h1.27
  text "GERBER FILE" at 261.366,145.145 h1.27
  text "G1" at 363.728,142.834 h1.27
  text "MIDLAYER1" at 321.158,142.732 h1.02
  text "GERBER FILE" at 261.366,142.605 h1.27
  text "INTERNALPLANE1" at 321.158,140.192 h1.02
  text "GP1" at 363.779,140.116 h1.27
  text "GERBER FILE" at 261.366,140.065 h1.27
  text "INTERNALPLANE2" at 321.158,137.652 h1.02
  text "GP2" at 363.728,137.627 h1.27
  text "GERBER FILE" at 261.366,137.525 h1.27
  text "MIDLAYER2" at 321.158,135.112 h1.02
  text "G2" at 363.728,135.087 h1.27
  text "GERBER FILE" at 261.366,134.985 h1.27
  text "BOTTOMLAYER" at 321.158,132.572 h1.02
  text "GBL" at 363.779,132.496 h1.27
  text "GERBER FILE" at 261.366,132.445 h1.27
  text "Bottom Solder Mask" at 321.158,130.083 h1.02
  text "GBS" at 363.779,129.956 h1.27
  text "GERBER FILE" at 261.366,129.905 h1.27
  text "Bottom Overlay" at 321.158,127.492 h1.02
  text "GBO" at 363.779,127.416 h1.27
  text "GERBER FILE" at 261.366,127.365 h1.27
  text "Bottom Paste Mask" at 321.158,125.003 h1.02
  text "GBP" at 363.779,124.876 h1.27
  text "GERBER FILE" at 261.366,124.825 h1.27
  text "PCB Boundary" at 321.158,122.412 h1.02
  text "GM1" at 363.779,122.336 h1.27
  text "GERBER FILE" at 261.366,122.285 h1.27
  text "APERTURE LIST" at 261.366,119.872 h1.27
  text "APR" at 313.979,119.796 h1.27
  text "DRILL REPORT" at 261.366,117.332 h1.27
  text "DRR" at 313.979,117.256 h1.27
  text "EXCELLON DRILL" at 261.366,114.792 h1.27
  text "TXT" at 313.979,114.716 h1.27
  text "MATERIAL:" at 261.62,99.298 h1.52
  text "GLASS FIBRE EPOXY RESIN NEMA GRADE FR4 (MIL-S-13949H)" at 287.274,99.044 h1.27
  text "X" at 284.607,98.917 h1.52
  text "THICKNESS:" at 269.494,96.123 h1.27
  text "0.8mm" at 287.274,96.123 h1.27
  text "1.2mm" at 304.927,96.123 h1.27
  text "1.6mm" at 322.58,96.123 h1.27
  text "2.4mm" at 340.36,96.123 h1.27
  text "3.2mm" at 358.14,96.123 h1.27
  text "X" at 320.167,95.996 h1.52
  text "TOLERANCE:" at 269.367,93.075 h1.27
  text "IN A/W IPC-D-300G CLASS" at 287.02,93.075 h1.27
  text "3 LEVEL B" at 321.945,93.075 h1.27
  text "OTHER +/-" at 340.36,93.075 h1.27
  text "X" at 284.607,92.948 h1.52
  text "BOW & TWIST:" at 266.954,90.027 h1.27
  text "IN A/W IPC-D-300G CLASS" at 287.02,90.027 h1.27
  text "3 LEVEL B" at 321.945,90.027 h1.27
  text "AS SHOWN" at 340.487,89.9 h1.27
  text "X" at 284.607,89.773 h1.52
  text "COPPER THICKNESS (FINISHED)" at 269.367,86.725 h1.27
  text "OUTER:" at 274.193,84.439 h1.27
  text "18um" at 287.274,84.439 h1.27
  text "35um" at 314.325,84.439 h1.27
  text "70um" at 340.614,84.439 h1.27
  text "X" at 311.582,84.236 h1.52
  text "INNER SIGNAL:" at 265.811,81.391 h1.27
  text "18um" at 287.274,81.391 h1.27
  text "35um" at 314.325,81.391 h1.27
  text "70um" at 340.614,81.391 h1.27
  text "X" at 311.531,81.188 h1.52
  text "INNER PWR:" at 269.494,78.343 h1.27
  text "18um" at 287.274,78.343 h1.27
  text "35um" at 314.325,78.343 h1.27
  text "70um" at 340.614,78.343 h1.27
  text "X" at 311.658,78.216 h1.52
  text "STRUCTURE:" at 261.62,75.295 h1.52
  text "REFER" at 287.274,75.295 h1.27
  text "AS PER DRAWING No." at 287.147,72.12 h1.27
  text "AS SHOWN" at 340.487,72.12 h1.27
  text "X" at 337.947,71.993 h1.52
  text "DRILLING:" at 261.62,69.326 h1.52
  text "VIEWED FROM:" at 266.573,67.04 h1.27
  text "COMPONENT SIDE" at 287.274,67.04 h1.14
  text "SOLDER SIDE" at 314.071,67.04 h1.14
  text "X" at 284.607,66.786 h1.52
  text "REFERENCE:" at 268.859,63.992 h1.27
  text "AS SHOWN" at 287.147,63.865 h1.14
  text "PATTERN MASTER LIST" at 314.198,63.865 h1.14
  text "X" at 337.947,63.865 h1.52
  text "NC_DRILL FILES" at 340.487,63.865 h1.14
  text "X" at 284.607,63.738 h1.52
  text "PTH MINIMUM COPPER THICKNESS:" at 274.701,60.944 h1.27
  text "20um" at 314.325,60.944 h1.27
  text "X" at 311.658,60.817 h1.52
  text "OTHER" at 340.487,60.817 h1.27
  text "NPTH:" at 275.209,57.896 h1.27
  text "TENTED" at 287.147,57.769 h1.14
  text "X" at 311.658,57.769 h1.52
  text "PADS REMOVED" at 314.198,57.769 h1.14
  text "REMOVE PADS" at 340.487,57.769 h1.14
  text "X" at 284.607,57.642 h1.52
  text "2nd DRILL" at 287.147,54.721 h1.14
  text "BOTH" at 314.198,54.721 h1.14
  text "AS SHOWN" at 326.517,54.721 h1.14
  text "NONE" at 340.487,54.721 h1.14
  text "BOARD FINISH:" at 261.62,51.8 h1.52
  text "X" at 284.607,51.673 h1.52
  text "ETCHING" at 287.147,51.673 h1.14
  text "REFER PATTERN MASTER LIST" at 314.198,51.673 h1.14
  text "LEGEND / SCREEN PRINT:" at 281.94,48.752 h1.27
  text "NONE" at 314.198,48.625 h1.14
  text "COMPONENT" at 326.517,48.625 h1.14
  text "SOLDER" at 340.487,48.625 h1.14
  text "X" at 323.977,48.498 h1.52
  text "X" at 337.947,48.498 h1.52
  text "COLOUR:" at 272.161,45.704 h1.27
  text "WHITE" at 287.147,45.577 h1.14
  text "YELLOW" at 314.198,45.577 h1.14
  text "OTHER" at 340.487,45.577 h1.14
  text "X" at 284.607,45.45 h1.52
  text "X" at 284.607,42.529 h1.52
  text "LIQUID PHOTOIMAGEABLE" at 287.147,42.529 h1.14
  text "SCREEN PRINT" at 326.517,42.529 h1.14
  text "MATTE" at 287.147,39.481 h1.14
  text "GLOSS" at 299.847,39.481 h1.14
  text "GREEN" at 314.198,39.481 h1.14
  text "BLUE" at 326.517,39.481 h1.14
  text "G/Y" at 340.487,39.481 h1.14
  text "OTHER" at 351.917,39.481 h1.14
  text "X" at 297.18,39.354 h1.52
  text "SOLDER MASK COLOUR:" at 261.62,36.56 h1.14
  text "BLACK" at 287.147,36.433 h1.14
  text "GREEN" at 299.847,36.433 h1.14
  text "YELLOW" at 314.198,36.433 h1.14
  text "BLUE" at 326.517,36.433 h1.14
  text "OTHER" at 340.487,36.433 h1.14
  text "X" at 284.48,36.306 h1.52
  text "TRACK FINISH:" at 261.62,33.512 h1.52
  text "SELECTIVE SOLDER (HASL)" at 287.147,33.385 h1.14
  text "REFLOW SOLDER" at 326.517,33.385 h1.14
  text "SELECTIVE GOLD" at 287.147,30.337 h1.14
  text "um  (AREA" at 314.198,30.337 h1.14
  text "sq. mm)" at 342.011,30.337 h1.14
  text "X" at 284.607,27.289 h1.52
  text "IMMERSION GOLD" at 287.147,27.289 h1.14
  text "OTHER" at 326.517,27.289 h1.14
  text "EDGE BOARD" at 261.62,24.368 h1.52
  text "1.3um HARD GOLD OVER 5um     NICKEL / TIN-NICKEL" at 287.147,24.241 h1.14
  text "CONTACTS:" at 261.62,22.209 h1.52
  text "HARD FINISH GOLDE PLATE" at 287.147,21.193 h1.14
  text "OTHER" at 326.517,21.193 h1.14
  text "AS SHOWN" at 287.147,18.145 h1.14
  text "REFER" at 326.517,18.145 h1.14
  text "PROFILING:" at 261.62,15.097 h1.52
  text "AS DIMENSIONED, MEASURED AND CUT FROM SPECIFIED DATUM." at 287.147,15.097 h1.14
  text "X" at 284.607,14.97 h1.52
  text "REFER PCB BLANK DWG No." at 287.274,12.176 h1.27
  text "USE PROFILE / ROUTE TAPE SUPPLIED (REFER PATTERN MASTER LIST)" at 287.274,9.128 h1.27
  text "SQUARE CUT" at 287.274,6.08 h1.27
  text "N.C. ROUTE" at 305.054,6.08 h1.27
  text "V. SCORE" at 322.834,6.08 h1.27
  text "BLANK" at 340.614,6.08 h1.27
  text "ACCEPTABILITY:" at 261.62,3.413 h1.52
  text "MATERIALS AND WORKMANSHIP FOR ALL PRINTED WIRING BOARDS TO MEET" at 283.845,3.286 h1.27
  text "OR EXCEED THE REQUIREMENTS OF:" at 283.845,0.492 h1.27
  text "IPC-6011/12 AND IPC-A-600E" at 287.401,-2.175 h1.27
  text "1" at 322.961,-2.175 h1.27
  text "2" at 331.851,-2.175 h1.27
  text "X" at 329.184,-2.302 h1.52
  text "X" at 284.734,-2.429 h1.52
  text "3" at 340.741,-4.334 h1.27
  text "UL CERTIFICATION" at 287.401,-5.223 h1.27
  text "AUSTEL" at 322.961,-5.223 h1.27
  text "X" at 284.734,-5.35 h1.52
  text "ML-P-55110F GRP" at 286.893,-8.271 h1.02
  text "A" at 305.181,-8.271 h1.27
  text "B" at 314.071,-8.271 h1.27
  text "AS2546" at 322.961,-8.271 h1.27
  text "OTHER" at 340.741,-8.271 h1.27
  text "ADDITIONAL" at 261.62,-11.192 h1.52
  text "NONE" at 287.401,-11.446 h1.27
  text "SAMPLE PLAN" at 305.181,-11.446 h1.27
  text "MIL-P-55110E SERIAL Nos. PER ORDER" at 322.961,-11.446 h1.27
  text "REQUIREMENTS:" at 261.62,-13.605 h1.52
  text "NONE" at 287.401,-14.494 h1.27
  text "ML-P-55110F GRP" at 304.673,-14.494 h1.02
  text "A" at 322.961,-14.494 h1.27
  text "B" at 331.851,-14.494 h1.27
  text "IPC CLASS:" at 337.82,-14.494 h1.27
  text "1" at 353.314,-14.494 h1.27
  text "2" at 359.664,-14.494 h1.27
  text "3" at 366.014,-14.494 h1.27
  text "QUALITY RELEASE REPORT" at 305.181,-17.542 h1.27
  text "OTHER" at 345.694,-17.542 h1.27
  text "PER ORDER" at 354.203,-17.669 h1.27
  text "X" at 343.027,-17.796 h1.52
  text "NONE" at 305.181,-20.59 h1.27
  text "REQUIRED" at 322.961,-20.59 h1.27
  text "PER ORDER" at 345.821,-20.59 h1.27
  text "ELECTRICAL TEST:" at 261.62,-20.717 h1.52
  text "X" at 320.294,-20.717 h1.52
  text "NONE" at 305.181,-23.638 h1.27
  text "1 SIDE" at 322.834,-23.638 h1.14
  text "2 SIDES" at 334.01,-23.638 h1.14
  text "MIN. PITCH" at 345.694,-23.638 h1.27
  text "0.65mm" at 359.283,-23.638 h1.27
  text "SURFACE MOUNT:" at 261.62,-23.765 h1.52
  text "X" at 331.775,-23.841 h1.52
  text "NONE" at 305.181,-26.686 h1.27
  text "FOIL" at 322.961,-26.686 h1.27
  text "LEGEND" at 334.391,-26.686 h1.27
  text "REFER" at 345.694,-26.686 h1.27
  text "MANUFACTURER'S ID/LOGO:" at 261.62,-26.813 h1.52
  text "ISO9001/AS3901" at 308.991,-29.734 h1.27
  text "NONE" at 345.694,-29.734 h1.27
  text "MANUFACTURER'S ACCREDITATION:" at 261.62,-29.861 h1.52
  text "X" at 306.324,-29.861 h1.52
  text "PER ORDER" at 305.181,-32.782 h1.27
  text "REFER" at 322.961,-32.782 h1.27
  text "PACKAGING AND HANDLING:" at 261.62,-32.909 h1.52
  text "X" at 302.514,-33.036 h1.52
Sheet:
  drawing of 1882 lines, arcs and shapes, not listed
  text "1" at 3.717,207.391 h1.78
  text "2" at 52.756,207.391 h1.78
  text "3" at 102.015,207.391 h1.78
  text "4" at 151.308,207.391 h1.78
  text "5" at 200.584,207.391 h1.78
  text "6" at 249.606,207.391 h1.78
  text "7" at 299.136,207.391 h1.78
  text "8" at 348.158,207.391 h1.78
  text "A" at -18.415,173.406 h1.78
  text "A" at 370.205,173.406 h1.78
  text "B" at -18.415,102.794 h1.78
  text "B" at 370.205,102.794 h1.78
  text "C" at -18.415,32.182 h1.78
  text "C" at 370.205,32.182 h1.78
  text "D" at -18.415,-37.922 h1.78
  text "D" at 370.205,-37.922 h1.78
  text "ENGINEER:" at 255.27,-38.1 h1.14
  text "TITLE:" at 293.37,-38.1 h1.14
  text "PCB DESIGNER:" at 255.27,-45.593 h1.14
  text "DATE:" at 255.27,-53.34 h1.14
  text "PART NO.:" at 293.37,-53.34 h1.14
  text "REV:" at 346.71,-53.34 h1.14
  text "Altium Limited" at 222.25,-55.88 h1.78
  text ".PRINT_DATE" at 256.54,-56.388 h1.78
  text "12a Rodborough Rd" at 222.25,-58.42 h1.78
  text "Frenchs Forest" at 222.25,-60.96 h1.78
  text "FILE NAME:" at 255.27,-60.96 h1.14
  text "DWG NO:" at 293.37,-60.96 h1.14
  text "SCALE:" at 346.71,-60.96 h1.14
  text "NSW 2086" at 222.25,-63.5 h1.78
  text ".PCB_FILE_NAME_NO_PATH" at 256.54,-64.008 h1.78
  text "1" at 3.717,-69.469 h1.78
  text "2" at 52.756,-69.469 h1.78
  text "3" at 102.015,-69.469 h1.78
  text "4" at 151.308,-69.469 h1.78
  text "5" at 200.584,-69.469 h1.78
  text "6" at 249.606,-69.469 h1.78
  text "7" at 299.136,-69.469 h1.78
  text "8" at 348.158,-69.469 h1.78
Drill Drawing:
  text ".Legend" at 0,-8 h0.75

## Dimensions
0.001,0.001 to 68.999,0.001 on Dimensions
0.001,0.001 to 0.001,77 on Dimensions
34.5,-69.801 to 34.5,84 on Dimensions

## Text inside footprints (layer, text, board x,y; h text height)
U2: Bottom Overlay "1" at 50.625,45.71 h0.8 r270; Bottom Overlay "3" at 50.625,50.532 h0.8 r270; Bottom Overlay "2" at 50.582,47.992 h0.8 r270